# Altium PCB Nucleo Board.PcbDoc
Units mil, origin at the board's own origin, x right, y up, seen from the top; angles counter-clockwise.
Board outline 2755.12 x 3250 mil, 2 copper layers (Top Layer, Bottom Layer), stack 65.792 mil thick; 28 components, 41 nets, 233 pads, 0 vias.
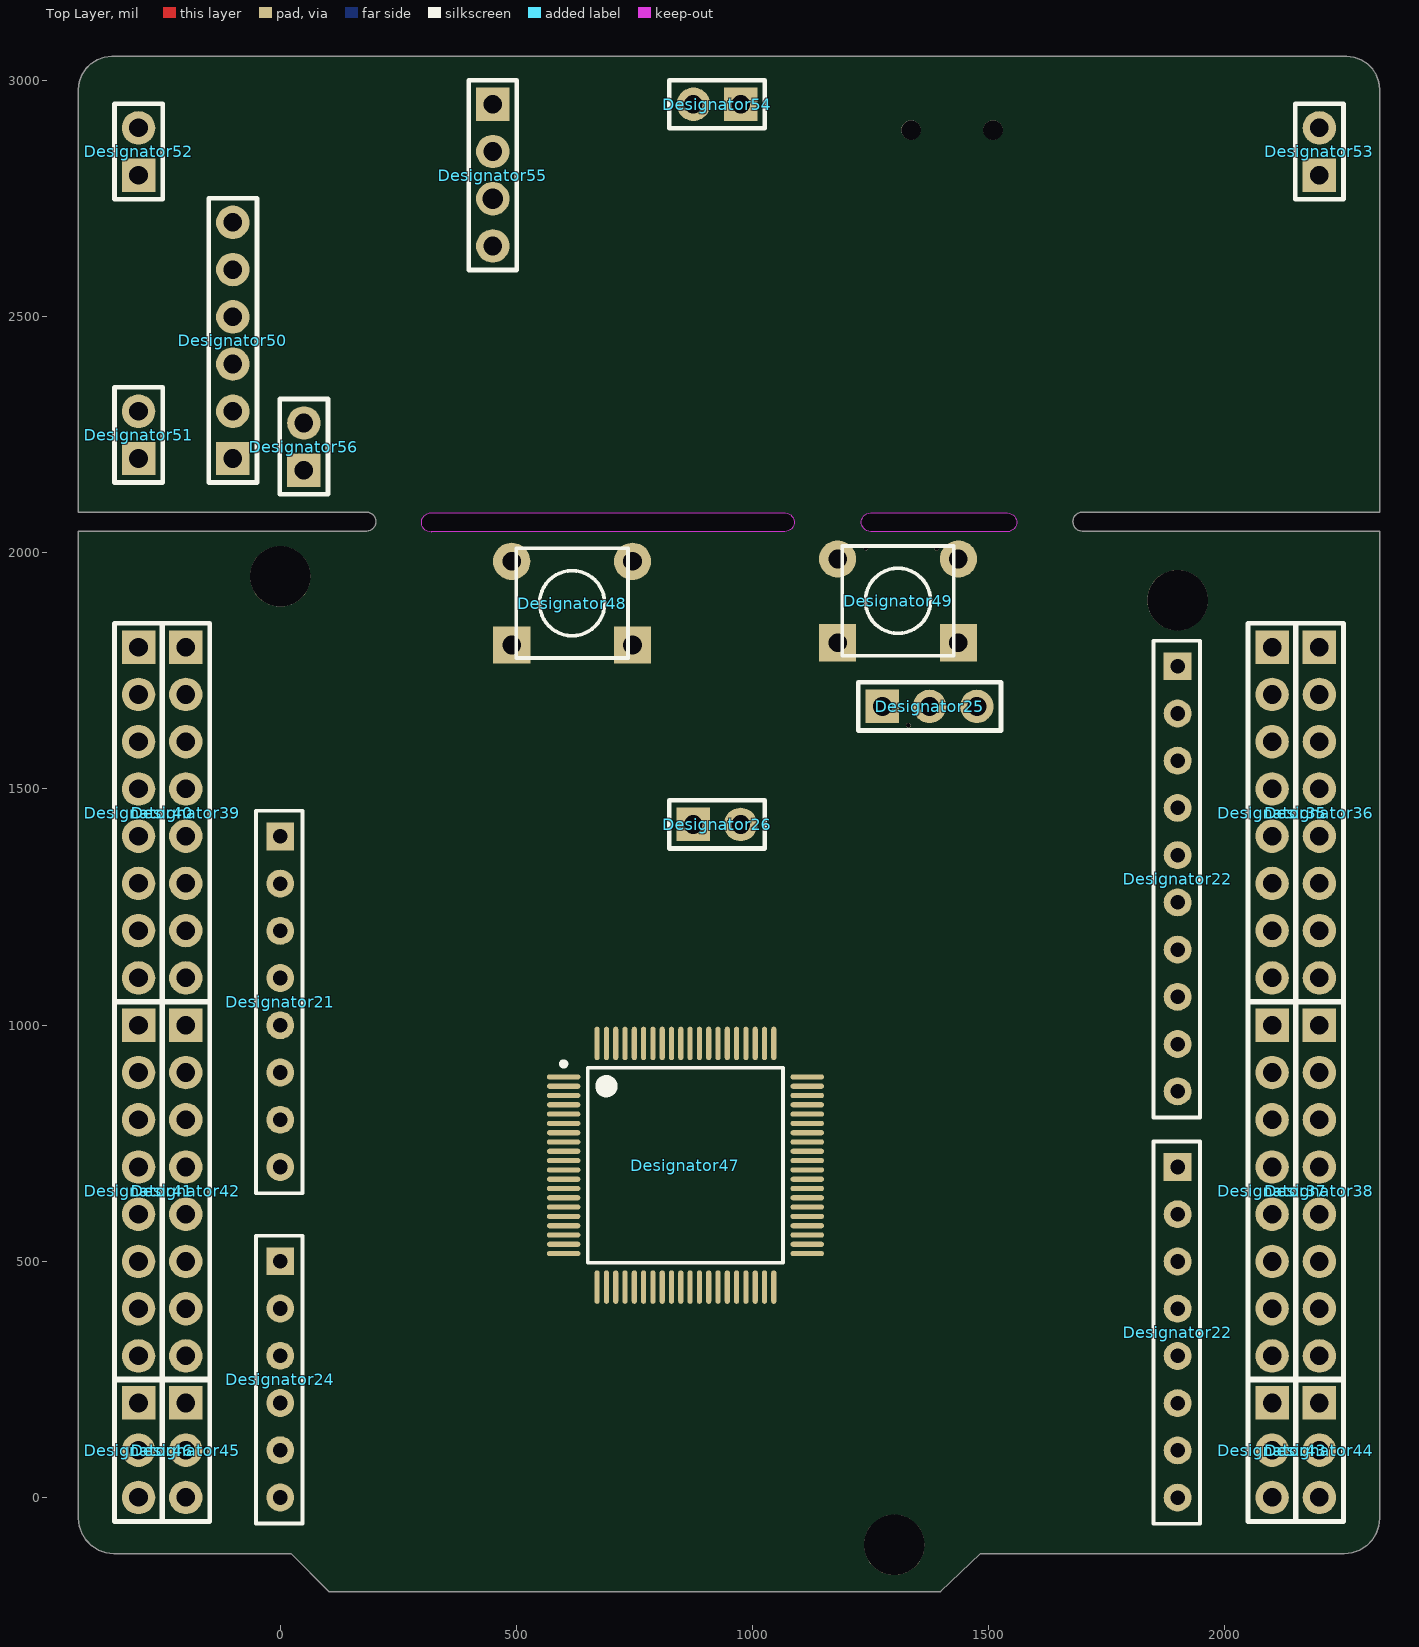
[diagram p0: Top Layer view]
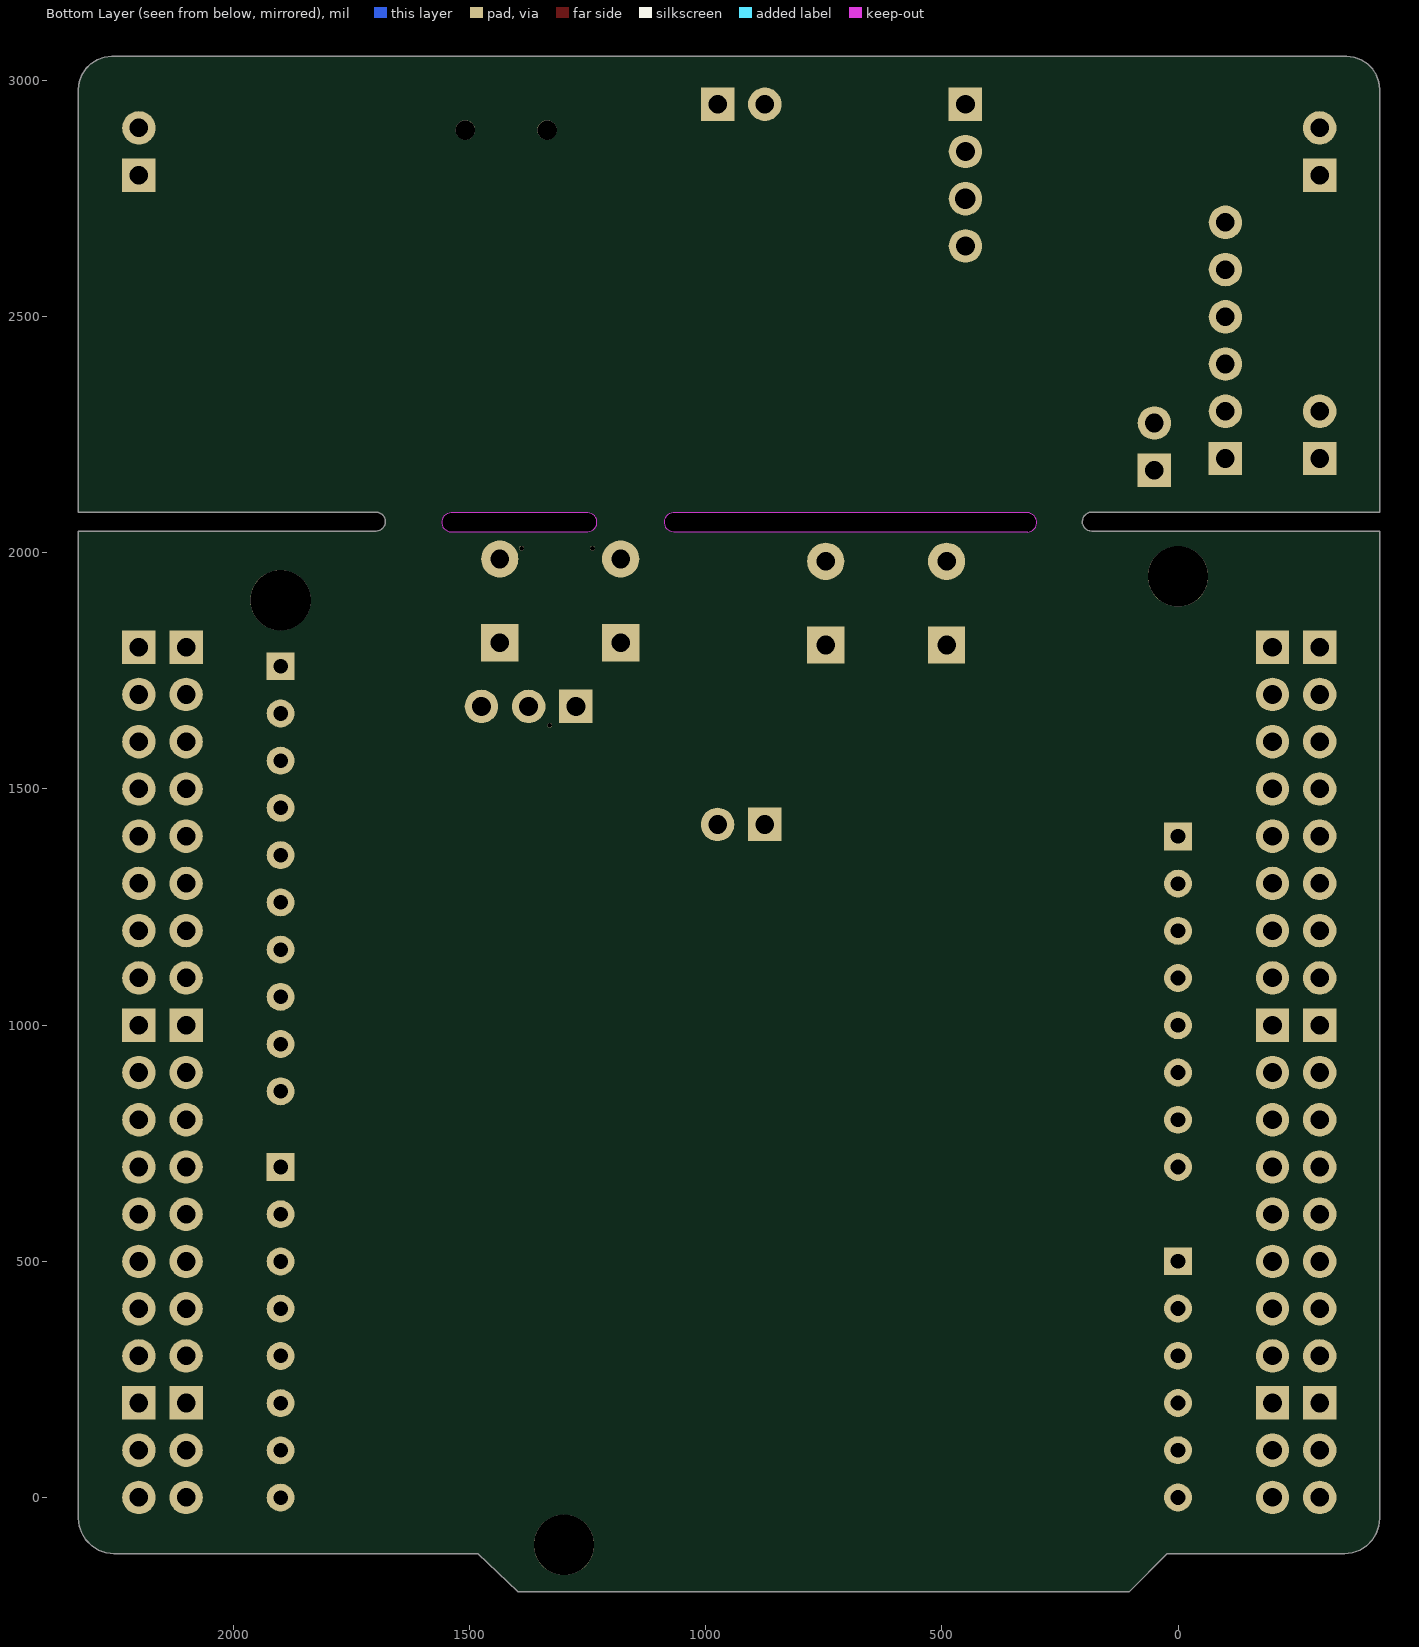
[diagram p1: Bottom Layer view, seen from below]

## Layer stack, top to bottom
Top Solder: solder mask 0.4, Solder Resist, Dk 3.5
Top Layer: signal copper 1.4
Dielectric1: core 62.9921, FR-4, Dk 4.8
Bottom Layer: signal copper 1.4
Bottom Solder: solder mask 0.4, Solder Resist, Dk 3.5

## Board outline
-352.36,-118.9 22.83,-118.9 102.76,-199.21 1398.03,-199.21 1482.68,-118.9 2252.76,-118.9 2269.45,-117.06 2285.31,-111.55 2299.55,-102.65 2311.46,-90.81 2320.43,-76.61 2326.02,-60.78 2327.95,-44.09 2327.95,2046.06 1698.03,2046.06 1693.56,2046.57 1689.32,2048.05 1685.51,2050.45 1682.34,2053.62 1679.94,2057.43 1678.46,2061.67 1677.95,2066.14 1678.5,2070.56 1680.01,2074.75 1682.42,2078.49 1685.59,2081.61 1689.39,2083.94 1693.6,2085.37 1698.03,2085.83 2327.95,2085.83 2327.95,2981.1 2326.15,2996.65 2320.94,3011.4 2312.58,3024.62 2301.48,3035.66 2288.21,3043.94 2273.43,3049.07 2257.87,3050.79 -357.09,3050.79 -372.64,3049.07 -387.42,3043.94 -400.69,3035.66 -411.79,3024.62 -420.15,3011.4 -425.36,2996.65 -427.17,2981.1 -427.17,2085.83 182.68,2085.83 187.11,2085.37 191.32,2083.94 195.11,2081.61 198.29,2078.49 200.7,2074.75 202.21,2070.56 202.76,2066.14 202.25,2061.67 200.77,2057.43 198.37,2053.62 195.19,2050.45 191.39,2048.05 187.14,2046.57 182.68,2046.06 -427.17,2046.06 -427.17,-44.09 -425.28,-60.74 -419.75,-76.55 -410.84,-90.73 -398.99,-102.57 -384.81,-111.48 -369.01,-117.02
cut-out: 319.69,2044.88 319.29,2043.7 315.04,2044.19 310.98,2045.55 307.3,2047.73 304.14,2050.62 301.66,2054.11 299.96,2058.03 299.11,2062.23 299.15,2066.51 300.08,2070.69 301.86,2074.58 304.41,2078.02 307.61,2080.85 311.34,2082.96 315.42,2084.24 319.69,2084.65 1068.9,2084.65 1073.02,2084.09 1076.93,2082.69 1080.47,2080.5 1083.48,2077.63 1085.82,2074.19 1087.4,2070.35 1088.14,2066.26 1088.02,2062.1 1087.03,2058.06 1085.23,2054.31 1082.69,2051.02 1079.52,2048.33 1075.85,2046.36 1071.86,2045.19 1067.72,2044.88
cut-out: 1538.98,2084.65 1543.15,2084.21 1547.14,2082.91 1550.78,2080.81 1553.9,2078 1556.37,2074.61 1558.07,2070.77 1558.94,2066.67 1558.94,2062.47 1558.07,2058.36 1556.37,2054.53 1553.9,2051.13 1550.78,2048.32 1547.14,2046.22 1543.15,2044.93 1538.98,2044.49 1538.98,2044.88 1250,2044.88 1245.87,2045.32 1241.91,2046.6 1238.31,2048.68 1235.22,2051.46 1232.78,2054.82 1231.09,2058.62 1230.23,2062.69 1230.23,2066.84 1231.09,2070.91 1232.78,2074.7 1235.22,2078.07 1238.31,2080.85 1241.91,2082.93 1245.87,2084.21 1250,2084.65

## Design rules (kind name [scope] priority, off if disabled: settings)
Clearance [All] p1: gap=15.75
FabricationTestPointUsage TestPointUsage [All] p1: valid=0 allowmultiple=FALSE
FabricationTestpoint Testpoint [All] p1: side=3 testpointundercomponent=TRUE minsize=40 maxsize=100 preferedsize=60 minholesize=0 maxholesize=40 preferedholesize=32 testpointgrid=1 allowsidetop=TRUE allowsidebottom=TRUE usegrid=TRUE gridtolerance=0.01
Height [All] p1: minheight=0 maxheight=1771.65 prefheight=500
HoleSize [All] p1: absolutevalues=TRUE maxlimit=314.96 minlimit=15.75 maxpercent=80.000 minpercent=20.000
PlaneClearance [All] p1: clearance=15.75
PlaneConnect [All] p1: planeconnectstyle=Direct reliefexpansion=20 reliefentries=4 reliefconductorwidth=10 reliefairgap=10
PolygonConnect [All] p1: connectstyle=Direct reliefconductorwidth=10 reliefentries=4 polygonreliefangle="90 Angle" airgapwidth=10
RoutingVias [All] p1: holewidth=19.68 width=39.69 viastyle="Through Hole" minholewidth=15.75 minwidth=28 maxholewidth=28 maxwidth=50
SilkToBoardRegionClearance [All] p1 off:
SilkToSolderMaskClearance SilkscreenOverComponentPads [IsPad] p1: minsilkscreentomaskgap=10 clearancetoexposedcopper=TRUE
SolderMaskExpansion [All] p1: expansion=4
Width [All] p1: maxlimit=314.96 minlimit=15.75 preferedwidth=39.37
22 further rules are at their usual default settings.

## Components (designator, comment, footprint, x,y, rotation, side; value= is the part's Value field where it differs from the comment)
Designator21 "Comment" "CON BARRA 8 VIAS 180°" 0,1399.61 r0 top
Designator22 "Comment" "CON BARRA 8 VIAS 180°" 1900,699.61 r0 top
Designator22 "Comment" "CON BARRA 10 VIAS 180°" 1900,1759.84 r0 top
Designator24 "Comment" "CON BARRA 6 Vias 180º" 0,500 r0 top
Designator25 "Comment" "HEADER 1x3" 1274.8,1674.8 r90 top
Designator26 "Comment" "HEADER 1x2" 874.8,1424.8 r90 top
Designator35 "Comment" "HEADER 1x8" 2100,1800 r0 top
Designator36 "Comment" "HEADER 1x8" 2200,1800 r0 top
Designator37 "Comment" "HEADER 1x8" 2100,999.61 r0 top
Designator38 "Comment" "HEADER 1x8" 2200,999.61 r0 top
Designator39 "Comment" "HEADER 1x8" -200,1800 r0 top
Designator40 "Comment" "HEADER 1x8" -300,1800 r0 top
Designator41 "Comment" "HEADER 1x8" -300,999.61 r0 top
Designator42 "Comment" "HEADER 1x8" -200,999.61 r0 top
Designator43 "Comment" "HEADER 1x3" 2100,200 r0 top
Designator44 "Comment" "HEADER 1x3" 2200,200 r0 top
Designator45 "Comment" "HEADER 1x3" -200,200 r0 top
Designator46 "Comment" "HEADER 1x3" -300,200 r0 top
Designator47 "Comment" "TQFP-80 P11" 857.95,703.31 r0 top
Designator48 "Comment" PushButton 617.95,1893.31 r90 top
Designator49 "Comment" PushButton 1307.95,1898.31 r90 top
Designator50 "Comment" "HEADER 1x6" -100.39,2199.61 r180 top
Designator51 "Comment" "HEADER 1x2" -300,2199.61 r180 top
Designator52 "Comment" "HEADER 1x2" -300,2799.61 r180 top
Designator53 "Comment" "HEADER 1x2" 2200,2799.61 r180 top
Designator54 "Comment" "HEADER 1x2" 974.8,2949.61 r270 top
Designator55 "Comment" "HEADER 1x4" 450,2949.61 r0 top
Designator56 "Comment" "HEADER 1x2" 50,2174.8 r180 top

## Footprints (in the part's own frame and the unit in brackets; to place one, negate y for a bottom-side part, rotate by r counter-clockwise, add the part's x,y. Pads: shape width x height; smd on the part's side, far side on the other; paste and mask are expansions set on the pad)
"CON BARRA 6 Vias 180º" [mm] "conector para barra de pinos"
  rect 1.5x1.5 hole 0.787: 1(0,0)
  round 1.5 hole 0.787: 2(0,-2.54) 3(0,-5.08) 4(0,-7.62) 5(0,-10.16) 6(0,-12.7)
  silkscreen extent -1.3,-14.11 1.2,1.37, body extent -1.25,-14.08 1.25,1.41, height 8.52
"CON BARRA 8 VIAS 180°" [mm] "conector para barra de pinos"
  rect 1.5x1.5 hole 0.787: 1(0,0)
  round 1.5 hole 0.787: 2(0,-2.54) 3(0,-5.08) 4(0,-7.62) 5(0,-10.16) 6(0,-12.7) 7(0,-15.24) 8(0,-17.78)
  silkscreen extent -1.3,-19.19 1.2,1.37, body extent -1.25,-19.17 1.25,1.4, height 8.55
"CON BARRA 10 VIAS 180°" [mm] "conector para barra de pinos"
  rect 1.5x1.5 hole 0.787: 1(0,0)
  round 1.5 hole 0.787: 2(0,-2.54) 3(0,-5.08) 4(0,-7.62) 5(0,-10.16) 6(0,-12.7) 7(0,-15.24) 8(0,-17.78) 9(0,-20.32) 10(0,-22.86)
  silkscreen extent -1.3,-24.27 1.2,1.37, body extent -1.25,-24.25 1.25,1.4, height 8.5
"HEADER 1x2" [mm]
  rect 1.8x1.8 hole 1 unplated: 1(0,0)
  round 1.8 hole 1 unplated: 2(0,-2.54)
  silkscreen extent -1.3,-3.84 1.3,1.3, body extent -1.22,-3.81 1.22,1.27, height 10.3
"HEADER 1x3" [mm]
  rect 1.8x1.8 hole 1 unplated: 1(0,0)
  round 1.8 hole 1 unplated: 2(0,-2.54) 3(0,-5.08)
  silkscreen extent -1.3,-6.38 1.3,1.3, body extent -1.22,-6.35 1.22,1.27, height 10.3
"HEADER 1x4" [mm]
  rect 1.8x1.8 hole 1 unplated: 1(0,0)
  round 1.8 hole 1 unplated: 2(0,-2.54) 3(0,-5.08) 4(0,-7.62)
  silkscreen extent -1.3,-8.92 1.3,1.3, body extent -1.22,-8.89 1.22,1.27, height 10.3
"HEADER 1x6" [mm]
  rect 1.8x1.8 hole 1 unplated: 1(0,0)
  round 1.8 hole 1 unplated: 2(0,-2.54) 3(0,-5.08) 4(0,-7.62) 5(0,-10.16) 6(0,-12.7)
  silkscreen extent -1.3,-14 1.3,1.3, body extent -1.22,-13.97 1.22,1.27, height 10.3
"HEADER 1x8" [mm]
  rect 1.8x1.8 hole 1 unplated: 1(0,0)
  round 1.8 hole 1 unplated: 2(0,-2.54) 3(0,-5.08) 4(0,-7.62) 5(0,-10.16) 6(0,-12.7) 7(0,-15.24) 8(0,-17.78)
  silkscreen extent -1.3,-19.08 1.3,1.3, body extent -1.22,-19.05 1.22,1.27, height 10.3
PushButton [mm]
  rect 2x2 hole 1: 1(-2.25,3.25) 1(-2.25,-3.25)
  round 2 hole 1: 2(2.25,3.25) 2(2.25,-3.25)
  silkscreen extent -2.95,-3 2.95,3, body extent -3.05,-3.55 3.05,3.55, height 9
"TQFP-80 P11" [mm] "Thin QFP, 80-Leads, Body 12x12mm, Pitch 0.5mm, IPC Medium Density"
  oval 1.8x0.279 smd: 1(-6.55,4.75) 2(-6.55,4.25) 3(-6.55,3.75) 4(-6.55,3.25) 5(-6.55,2.75) 6(-6.55,2.25) 7(-6.55,1.75) 8(-6.55,1.25) 9(-6.55,0.75) 10(-6.55,0.25) 11(-6.55,-0.25) 12(-6.55,-0.75) 13(-6.55,-1.25) 14(-6.55,-1.75) 15(-6.55,-2.25) 16(-6.55,-2.75) 17(-6.55,-3.25) 18(-6.55,-3.75) 19(-6.55,-4.25) 20(-6.55,-4.75) 41(6.55,-4.75) 42(6.55,-4.25) 43(6.55,-3.75) 44(6.55,-3.25) 45(6.55,-2.75) 46(6.55,-2.25) 47(6.55,-1.75) 48(6.55,-1.25) 49(6.55,-0.75) 50(6.55,-0.25) 51(6.55,0.25) 52(6.55,0.75) 53(6.55,1.25) 54(6.55,1.75) 55(6.55,2.25) 56(6.55,2.75) 57(6.55,3.25) 58(6.55,3.75) 59(6.55,4.25) 60(6.55,4.75)
  oval 0.279x1.8 smd: 21(-4.75,-6.55) 22(-4.25,-6.55) 23(-3.75,-6.55) 24(-3.25,-6.55) 25(-2.75,-6.55) 26(-2.25,-6.55) 27(-1.75,-6.55) 28(-1.25,-6.55) 29(-0.75,-6.55) 30(-0.25,-6.55) 31(0.25,-6.55) 32(0.75,-6.55) 33(1.25,-6.55) 34(1.75,-6.55) 35(2.25,-6.55) 36(2.75,-6.55) 37(3.25,-6.55) 38(3.75,-6.55) 39(4.25,-6.55) 40(4.75,-6.55) 61(4.75,6.55) 62(4.25,6.55) 63(3.75,6.55) 64(3.25,6.55) 65(2.75,6.55) 66(2.25,6.55) 67(1.75,6.55) 68(1.25,6.55) 69(0.75,6.55) 70(0.25,6.55) 71(-0.25,6.55) 72(-0.75,6.55) 73(-1.25,6.55) 74(-1.75,6.55) 75(-2.25,6.55) 76(-2.75,6.55) 77(-3.25,6.55) 78(-3.75,6.55) 79(-4.25,6.55) 80(-4.75,6.55)
  silkscreen extent -6.67,-5.25 5.25,5.57, body extent -7,-7 7,7, height 1.01

## Free pads (board coordinates)
  round 127.95 hole 127.95: 1(0,1950) 1(1300,-100.39) 1(1900,1899.61)
  round 43.31 hole 43.31: 1(450,2750)
  round 9.84 hole 9.84: 1(1239.76,2009.84) 1(1329.92,1634.65) 1(1389.76,2009.84)
  round 40.16 hole 40.16: 1(1274.8,1674.8) 1(1374.8,1674.8) 1(1474.8,1674.8)
  round 41.34 hole 41.34: 1(1335.83,2894.88) 1(1509.06,2894.88)

## Nets (pads, with @x,y where several pads share a name; then routed paths per layer and width w, separated by ;. In a path a pad name is that pad's centre, name@x,y a point inside that pad or via, vN(x,y) a via of type N, cw(c..) or ccw(c..) an arc to the next point about the centre after c; other vN are vias at no path point)
+3V3: 
+5V: 
+17V: 
A0: 
A1: 
A2: 
A3: 
A4: 
A5: 
AVDD: 
BAT: 
BAT(SENS): 
D0: 
D1: 
D2: 
D3: 
D4: 
D5: 
D6: 
D7: 
D8: 
D9: 
D10: 
D11: 
D12: 
D13: 
D14: 
D15: 
GND: 
IOREF: 
NC: 
NetC1_2: 
NetC65_1: 
NetJumper_1: 
NetR2_2: 
NetR3_1: 
NetR3_2: 
NetR5_1: 
NetR5_3: 
RESET: 
VIN: 
pads on no net: Designator21.1 Designator21.2 Designator21.3 Designator21.4 Designator21.5 Designator21.6 Designator21.7 Designator21.8 Designator22.1 Designator22.2 Designator22.3 Designator22.4 Designator22.5 Designator22.6 Designator22.7 Designator22.8 Designator22.9 Designator22.10 Designator24.1 Designator24.2 Designator24.3 Designator24.4 Designator24.5 Designator24.6 Designator25.1 Designator25.2 Designator25.3 Designator26.1 Designator26.2 Designator35.1 Designator35.2 Designator35.3 Designator35.4 Designator35.5 Designator35.6 Designator35.7 Designator35.8 Designator36.1 Designator36.2 Designator36.3 Designator36.4 Designator36.5 Designator36.6 Designator36.7 Designator36.8 Designator37.1 Designator37.2 Designator37.3 Designator37.4 Designator37.5 Designator37.6 Designator37.7 Designator37.8 Designator38.1 Designator38.2 Designator38.3 Designator38.4 Designator38.5 Designator38.6 Designator38.7 Designator38.8 Designator39.1 Designator39.2 Designator39.3 Designator39.4 Designator39.5 Designator39.6 Designator39.7 Designator39.8 Designator40.1 Designator40.2 Designator40.3 Designator40.4 Designator40.5 Designator40.6 Designator40.7 Designator40.8 Designator41.1 Designator41.2 Designator41.3 Designator41.4 Designator41.5 Designator41.6 Designator41.7 Designator41.8 Designator42.1 Designator42.2 Designator42.3 Designator42.4 Designator42.5 Designator42.6 Designator42.7 Designator42.8 Designator43.1 Designator43.2 Designator43.3 Designator44.1 Designator44.2 Designator44.3 Designator45.1 Designator45.2 Designator45.3 Designator46.1 Designator46.2 Designator46.3 Designator47.1 Designator47.2 Designator47.3 Designator47.4 Designator47.5 Designator47.6 Designator47.7 Designator47.8 Designator47.9 Designator47.10 Designator47.11 Designator47.12 Designator47.13 Designator47.14 Designator47.15 Designator47.16 Designator47.17 Designator47.18 Designator47.19 Designator47.20 Designator47.21 Designator47.22 Designator47.23 Designator47.24 Designator47.25 Designator47.26 Designator47.27 Designator47.28 Designator47.29 Designator47.30 Designator47.31 Designator47.32 Designator47.33 Designator47.34 Designator47.35 Designator47.36 Designator47.37 Designator47.38 Designator47.39 Designator47.40 Designator47.41 Designator47.42 Designator47.43 Designator47.44 Designator47.45 Designator47.46 Designator47.47 Designator47.48 Designator47.49 Designator47.50 Designator47.51 Designator47.52 Designator47.53 Designator47.54 Designator47.55 Designator47.56 Designator47.57 Designator47.58 Designator47.59 Designator47.60 Designator47.61 Designator47.62 Designator47.63 Designator47.64 Designator47.65 Designator47.66 Designator47.67 Designator47.68 Designator47.69 Designator47.70 Designator47.71 Designator47.72 Designator47.73 Designator47.74 Designator47.75 Designator47.76 Designator47.77 Designator47.78 Designator47.79 Designator47.80 Designator48.1 Designator48.2 Designator49.1 Designator49.2 Designator50.1 Designator50.2 Designator50.3 Designator50.4 Designator50.5 Designator50.6 Designator51.1 Designator51.2 Designator52.1 Designator52.2 Designator53.1 Designator53.2 Designator54.1 Designator54.2 Designator55.1 Designator55.2 Designator55.3 Designator55.4 Designator56.1 Designator56.2

## Keep-outs
Keep-Out Layer:
  lines w5: -3262.05,-538.19 -3065.2,-538.19 ; -3262.05,1430.31 -3065.2,1430.31 ; -3262.05,3398.82 -3065.2,3398.82 ; -437.24,-2506.69 -437.24,-2309.84 ; -437.24,5170.47 -437.24,5367.32 ; 2387.56,-2506.69 2387.56,-2309.84 ; 2387.56,5170.47 2387.56,5367.32 ; 2919.05,-2309.84 2919.05,-1719.29 7840.31,-1719.29 ; 4730.08,-2309.84 4730.08,-1719.29 ; 4730.08,-2211.42 7840.31,-2211.42 ; 4730.08,-2112.99 7840.31,-2112.99 ; 4730.08,-1916.14 7840.31,-1916.14 ; 5212.36,-2506.69 5212.36,-2309.84 ; 5212.36,5170.47 5212.36,5367.32 ; 5438.74,-2112.99 5438.74,-1916.14 ; 6619.84,-2211.42 6619.84,-2112.99 ; 6619.84,-1916.14 6619.84,-1719.29 ; 7840.31,-538.19 8037.16,-538.19 ; 7840.31,1430.31 8037.16,1430.31 ; 7840.31,3398.82 8037.16,3398.82 ; -3262.05,-2506.69 8037.16,-2506.69 8037.16,5367.32 -3262.05,5367.32 -3262.05,-2506.69 ; -3065.2,-2309.84 7840.31,-2309.84 7840.31,5170.47 -3065.2,5170.47 -3065.2,-2309.84
  lines w10: -2834.02,3888.39 -2834.02,4998.62 -1652.92,4998.62 -1652.92,3888.39 -2834.02,3888.39
  text "1" at -1849.84,5249.21 h70
  text "2" at 975.16,5249.21 h70
  text "3" at 3799.96,5249.21 h70
  text "4" at 6624.76,5249.21 h70
  text "Production Details:" at -2735.59,4801.77 h78.74
  text "Layers: Dual layer;" at -2676.54,4644.29 h78.74
  text "Finish: Hot air;" at -2676.54,4486.81 h78.74
  text "A" at -3183.31,4383.07 h70
  text "A" at 7919.05,4383.07 h70
  text "Material: Fiber;" at -2676.54,4329.33 h78.74
  text "Thickness: 1,6mm;" at -2693.27,4159.06 h78.74
  text "Copper: 1 Oz;" at -2693.27,4000.59 h78.74
  text "B" at -3183.31,2414.57 h70
  text "B" at 7919.05,2414.57 h70
  text "C" at -3183.31,446.06 h70
  text "C" at 7919.05,446.06 h70
  text "D" at -3183.31,-1522.44 h70
  text "D" at 7919.05,-1522.44 h70
  text "Projetista:" at 6675.43,-1819.36 h45
  text ".ComputerName" at 7005.43,-1829.36 h70
  text "Projeto:" at 4785.43,-1834.36 h45
  text ".Pcb_File_Name_No_Path" at 5065.43,-1839.36 h70
  text "Tamanho:" at 4785.43,-1984.36 h45
  text "Name:" at 5470.43,-2014.36 h45
  text ".Pcb_File_Name_No_Path" at 5685.43,-2038.11 h70
  text "A4" at 5115.43,-2064.36 h70
  text "Data:" at 4785.43,-2169.36 h45
  text "Pagina:" at 6675.43,-2174.36 h45
  text "de" at 7115.43,-2174.36 h45
  text ".PRINT_DATE" at 4978.11,-2180.42 h59.06
  text "1" at 7013.54,-2192.23 h70
  text "1" at 7249.76,-2192.23 h70
  text "File:" at 4785.43,-2279.36 h45
  text ".Pcb_File_Name" at 4938.74,-2278.85 h55.12
  text "1" at -1849.84,-2427.95 h70
  text "2" at 975.16,-2427.95 h70
  text "3" at 3799.96,-2427.95 h70
  text "4" at 6624.76,-2427.95 h70
  text "Humberto Kramm / Patricio Bischoff / Guilherme Weber" at 3176.53,-2598.82 h98.43